# EAGLE board PCB-RPIBO1_HDMIEXT (EAGLE 6.5.0)
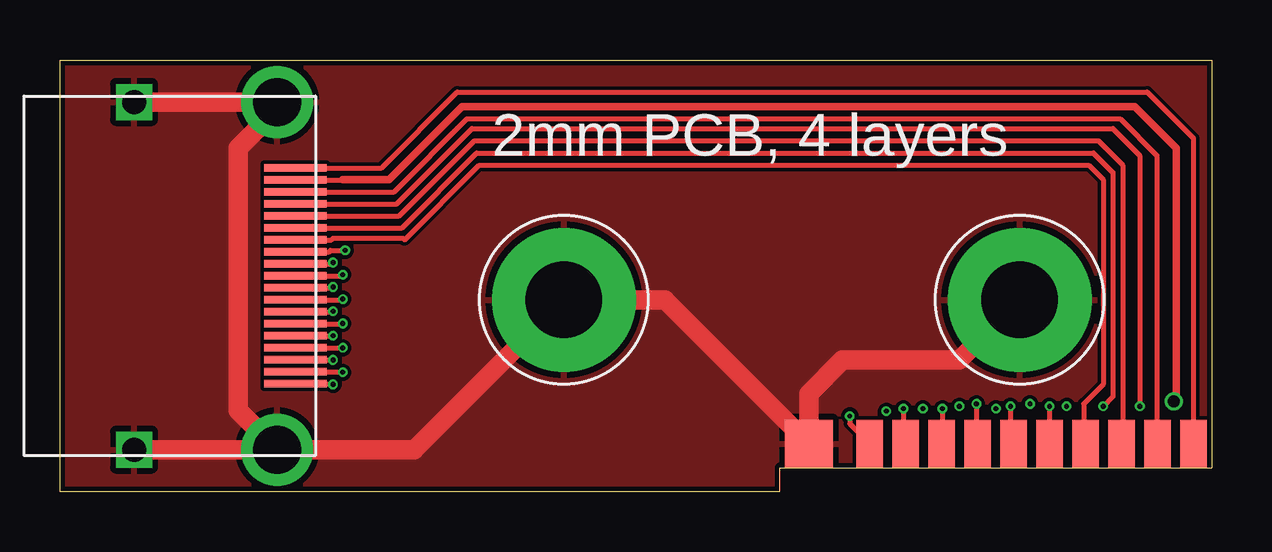
[diagram p0: board, top side]
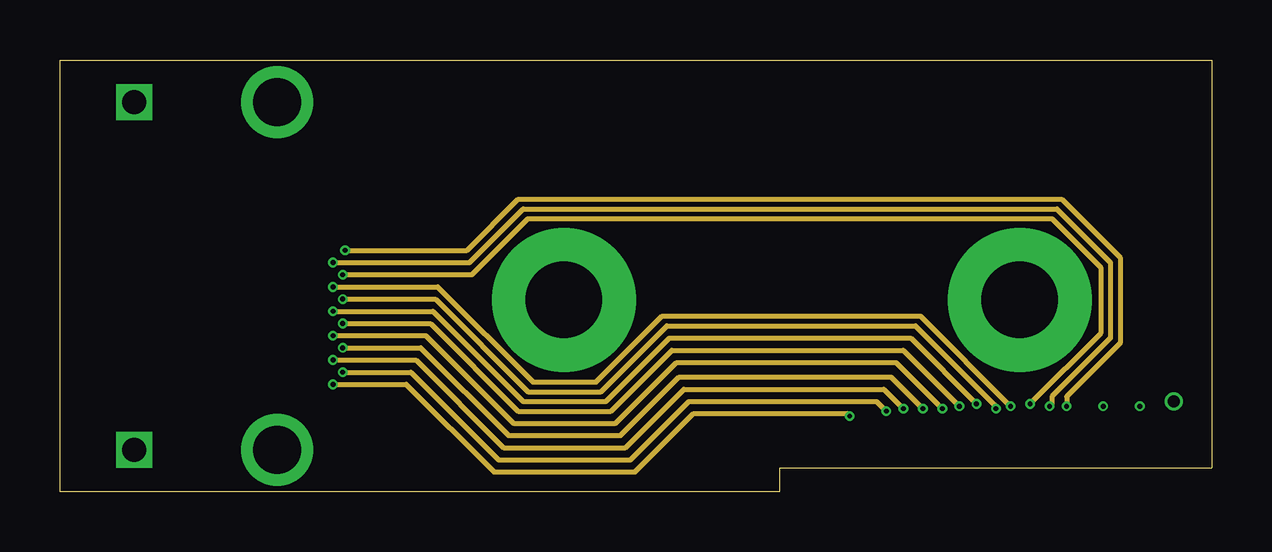
[diagram p1: board, inner layer Route2]
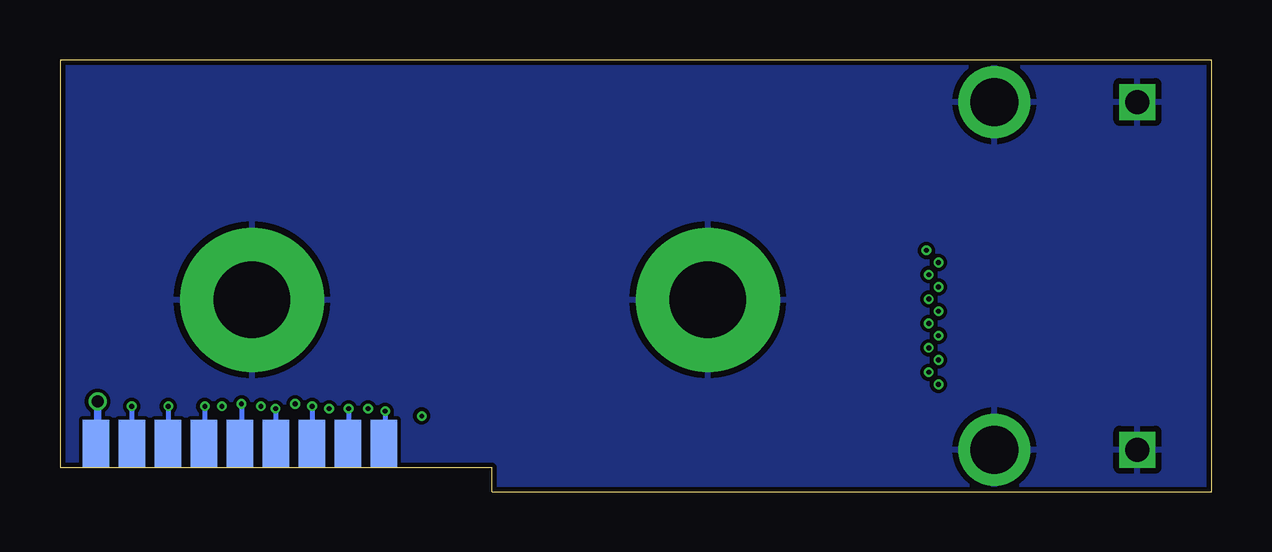
[diagram p2: board, bottom side, seen from below]

Size 48 x 18 mm. Coordinates in mm from the lower left corner, seen from the top.
Outline: 0,0 0,18 48,18 48,1 30,1 30,0 0,0
Copper layers (1*2*15*16): Top 0.035mm / dielectric 0.2mm / Route2 0.0175mm / dielectric 0.3mm / Route15 0.0175mm / dielectric 0.2mm / Bottom 0.035mm
Design rules "SeeedStudio_DRU-4layer_no_angle_20130527": minimum track width 4mil, minimum drill 0.2mm, track to track 6mil, track to pad 6mil, pad to pad 6mil, via to via 6mil, smd to smd 0mil, copper to edge 8mil, drill to drill 8mil, minimum pad ring 6mil, minimum via ring 4mil, stop-mask expansion 4mil, vias tented up to drill 100mil, thermal gap 10mil
Net classes: 0 default: width 0.203 mm, clearance 0.152 mm; 1 Power: width 0.203 mm, clearance 0.152 mm

## Footprints (pad centres in the part's own frame; a part is rotated, then mirrored left to right if it is on the bottom)
HDMI = smd 0.3 x 2.6: C1 4.5,10.31; C2 4,10.31; C3 3.5,10.31; C4 3,10.31; C5 2.5,10.31; C6 2,10.31; C7 1.5,10.31; C8 1,10.31; C9 0.5,10.31; C10 0,10.31; C11 -0.5,10.31; C12 -1,10.31; C13 -1.5,10.31; C14 -2,10.31; C15 -2.5,10.31; C16 -3,10.31; C17 -3.5,10.31; C18 -4,10.31; C19 -4.5,10.31 | drill 1 square: GND2 7.25,3.59; GND3 -7.25,3.59 | drill 2: P$2 7.25,9.55; P$3 -7.25,9.55
HDMI_MALEINTERCON = smd 1.1 x 2: C1 -6.75,1; C3 -5.25,1; C5 -3.75,1; C7 -2.25,1; C9 -0.75,1; C11 0.75,1; C13 2.25,1; C15 3.75,1; C17 5.25,1; C19 6.75,1 | smd 1.1 x 2 bottom: C2 -6,1; C4 -4.5,1; C6 -3,1; C8 -1.5,1; C10 0,1; C12 1.5,1; C14 3,1; C16 4.5,1; C18 6,1 | smd 2 x 2: GND -9.29,1
3.2MMPAD6MM = drill 3.2 pad 6: P$1 0,0

## Placement (x,y rotation side)
U$1  HDMI  [HDMI]  -0.5,9 270 top
U$2  HDMIPCBMALECON  [HDMI_MALEINTERCON]  40.5,1 0 top
U$3  GNDPAD6MM  [3.2MMPAD6MM]  21,8 0 top
U$5  GNDPAD6MM  [3.2MMPAD6MM]  40,8 0 top

## Library data of the parts
U$1-U$3 U$5 = SKAARHOJ

## Nets
GND [Power]: U$1.GND2 U$1.GND3 U$1.P$2 U$1.P$3 U$2.GND U$3.P$1 U$5.P$1
N$1: U$1.C1 U$2.C1
N$2: U$1.C2 U$2.C2
N$3: U$1.C3 U$2.C3
N$4: U$1.C4 U$2.C4
N$5: U$1.C5 U$2.C5
N$6: U$1.C6 U$2.C6
N$7: U$1.C7 U$2.C7
N$8: U$1.C8 U$2.C8
N$9: U$1.C9 U$2.C9
N$10: U$1.C10 U$2.C10
N$11: U$1.C11 U$2.C11
N$12: U$1.C12 U$2.C12
N$13: U$1.C13 U$2.C13
N$14: U$1.C14 U$2.C14
N$15: U$1.C15 U$2.C15
N$16: U$1.C16 U$2.C16
N$17: U$1.C17 U$2.C17
N$18: U$1.C18 U$2.C18
N$19: U$1.C19 U$2.C19

## Tracks (layer width: path | path; a pad name or v marks a point on that pad's centre or on a via)
GND
  Top 0.813: U$1.GND2 U$1.P$2 | U$1.GND3 U$1.P$3 9.05,15.96 7.42,14.33 7.42,3.38 U$1.P$2 | U$1.P$2 14.75,1.75 U$3.P$1 25.21,8 U$2.GND 31.21,4.08 32.61,5.49 37.49,5.49 U$5.P$1
  pour Bottom: 0,0 48.26,0 48.26,18.41 0,18.41
  pour Top: 0,0 48.26,0 48.26,18.41 0,18.41
N$1  (via drill 0.2)
  Top 0.203: U$1.C1 11.35,4.5 v11.38,4.47 | v32.92,3.15 32.92,2.83 U$2.C1
  Route2 0.203: v11.38,4.47 14.43,4.47 18.09,0.81 23.98,0.81 26.42,3.25 32.82,3.25 v32.92,3.15
N$2  (via drill 0.2)
  Top 0.203: U$1.C2 11.76,5 v11.79,4.98
  Route2 0.203: v11.79,4.98 14.63,4.98 18.29,1.32 23.77,1.32 26.21,3.76 34.04,3.76 v34.44,3.35
  Bottom 0.203: v34.44,3.35 34.44,2.06 U$2.C2
N$3  (via drill 0.2)
  Top 0.203: U$1.C3 11.37,5.5 v11.38,5.49 | v35.15,3.45 35.15,2.1 U$2.C3
  Route2 0.203: v11.38,5.49 14.83,5.49 18.49,1.83 23.57,1.83 26.01,4.27 34.34,4.27 v35.15,3.45
N$4  (via drill 0.2)
  Top 0.203: U$1.C4 v11.78,6 v11.79,5.99
  Route2 0.203: v11.79,5.99 15.04,5.99 18.69,2.34 23.37,2.34 25.81,4.78 34.65,4.78 v35.97,3.45
  Bottom 0.203: v35.97,3.45 35.97,2.03 U$2.C4
N$5  (via drill 0.2)
  Top 0.203: U$1.C5 v11.38,6.5 | v36.78,3.45 36.78,2.03 U$2.C5
  Route2 0.203: v11.38,6.5 15.24,6.5 18.9,2.85 23.16,2.85 25.7,5.38 34.85,5.38 v36.78,3.45
N$6  (via drill 0.2)
  Top 0.203: U$1.C6 11.78,7 v11.79,7.01
  Route2 0.203: v11.79,7.01 15.44,7.01 19.1,3.35 22.96,3.35 25.5,5.89 35.15,5.89 v37.49,3.56
  Bottom 0.203: v37.49,3.56 U$2.C6
N$7  (via drill 0.2)
  Top 0.203: U$1.C7 11.36,7.5 v11.38,7.52 | v38.2,3.66 38.2,2.05 U$2.C7
  Route2 0.203: v11.38,7.52 15.54,7.52 19.3,3.76 22.76,3.76 25.4,6.4 35.46,6.4 v38.2,3.66
N$8  (via drill 0.2)
  Top 0.203: U$1.C8 11.76,8 v11.79,8.03
  Route2 0.203: v11.79,8.03 15.65,8.03 19.51,4.17 22.55,4.17 25.3,6.91 35.66,6.91 39.01,3.56 v39.01,3.45
  Bottom 0.203: v39.01,3.45 39.01,2.01 U$2.C8
N$9  (via drill 0.2)
  Top 0.203: U$1.C9 11.35,8.5 v11.38,8.53 | v39.62,3.56 39.62,2.13 U$2.C9
  Route2 0.203: v11.38,8.53 15.75,8.53 19.71,4.57 22.35,4.57 25.09,7.32 35.87,7.32 v39.62,3.56
N$10  (via drill 0.2)
  Top 0.203: U$1.C10 11.74,9 v11.79,9.04
  Route2 0.203: v11.79,9.04 17.17,9.04 19.51,11.38 41.35,11.38 43.38,9.35 43.38,6.6 v40.44,3.66
  Bottom 0.203: v40.44,3.66 40.44,2.06 U$2.C10
N$11  (via drill 0.2)
  Top 0.203: U$1.C11 11.33,9.5 v11.38,9.55 | v41.25,3.56 U$2.C11 | U$2.C11
  Route2 0.203: v11.38,9.55 17.07,9.55 19.3,11.79 41.55,11.79 43.79,9.55 43.79,6.4 41.35,3.96 41.35,3.66 v41.25,3.56
N$12  (via drill 0.2)
  Top 0.203: 11.83,10 v11.89,10.06 11.28,10.06 11.22,10 U$1.C12
  Route2 0.203: v11.89,10.06 16.97,10.06 19.1,12.19 41.76,12.19 44.2,9.75 44.2,6.2 41.96,3.96 v41.96,3.56
  Bottom 0.203: v41.96,3.56 41.96,2.04 U$2.C12
N$13
  Top 0.203: U$2.C13 42.67,2.08 42.67,3.66 43.48,4.47 43.48,13.01 42.88,13.61 17.48,13.61 14.36,10.5 14.29,10.57 11.38,10.57 11.31,10.5 U$1.C13
N$14  (via drill 0.2)
  Top 0.203: U$1.C14 14.25,11 17.37,14.12 43.08,14.12 43.89,13.31 43.89,3.96 v43.48,3.56
  Bottom 0.203: v43.48,3.56 43.48,2.02 U$2.C14
N$15
  Top 0.203: U$1.C15 14.14,11.5 17.27,14.63 43.28,14.63 44.3,13.61 44.3,2.05 U$2.C15
N$16  (via drill 0.2)
  Top 0.203: U$1.C16 14.03,12 17.17,15.14 43.89,15.14 45.01,14.02 v45.01,3.56
  Bottom 0.203: v45.01,3.56 U$2.C16
N$17
  Top 0.203: U$1.C17 13.92,12.5 16.97,15.54 44.2,15.54 45.72,14.02 45.72,2.03 U$2.C17
N$18  (via drill 0.5)
  Top 0.203: U$1.C18 11.78,13 11.79,13.01
  Top 0.305: 11.79,13.01 13.72,13.01 16.76,16.05 44.81,16.05 46.53,14.33 46.53,3.86 v46.43,3.76
  Bottom 0.305: v46.43,3.76 46.43,2.07 U$2.C18
N$19
  Top 0.203: U$1.C19 13.4,13.5 16.56,16.66 45.31,16.66 47.24,14.73 U$2.C19

## Text on the board
_tsilk: 2mm PCB, 4 layers